# Altium PCB RFM232_V03.PcbDoc
Units mm, origin at the board's own origin, x right, y up, seen from the top; angles counter-clockwise.
Board outline 78.25 x 18.25 mm, 2 copper layers (Top Layer, Bottom Layer), stack 1.571 mm thick; 23 components, 24 nets, 95 pads, 35 vias.
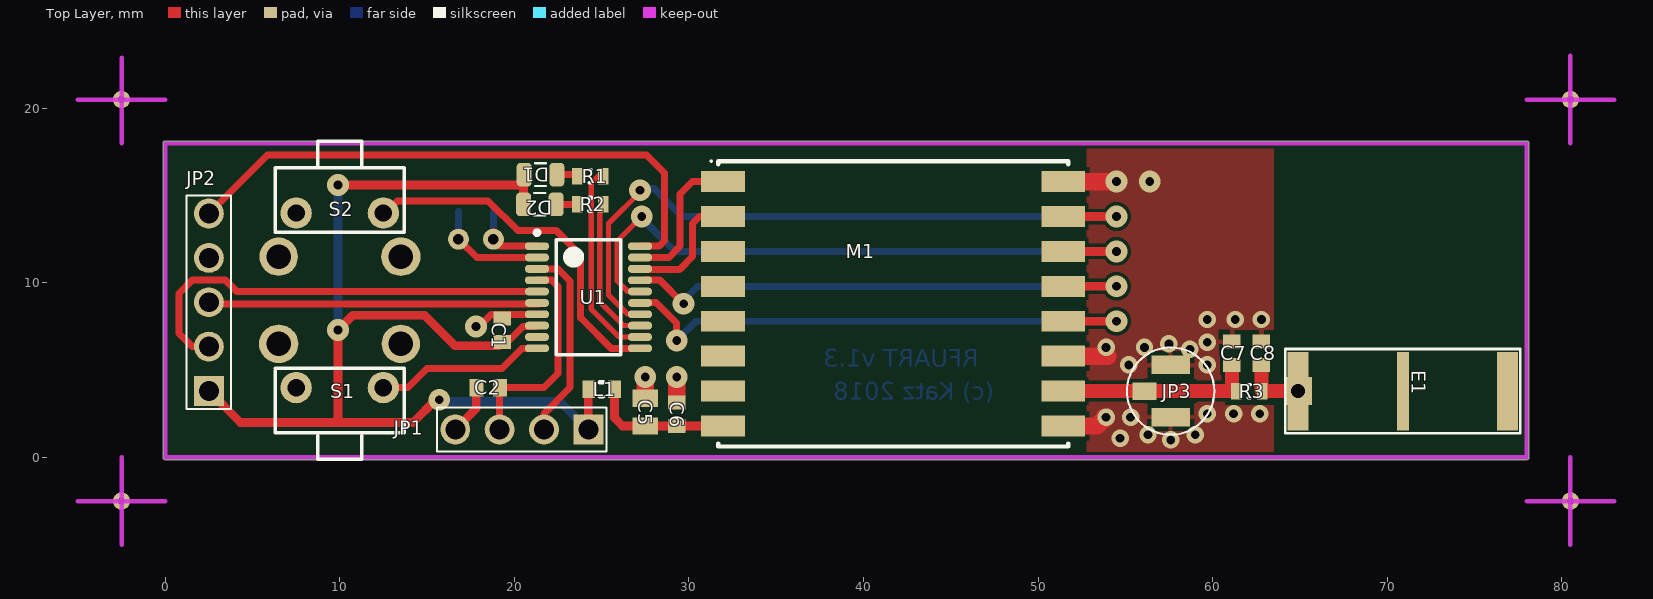
[diagram p0: Top Layer view]
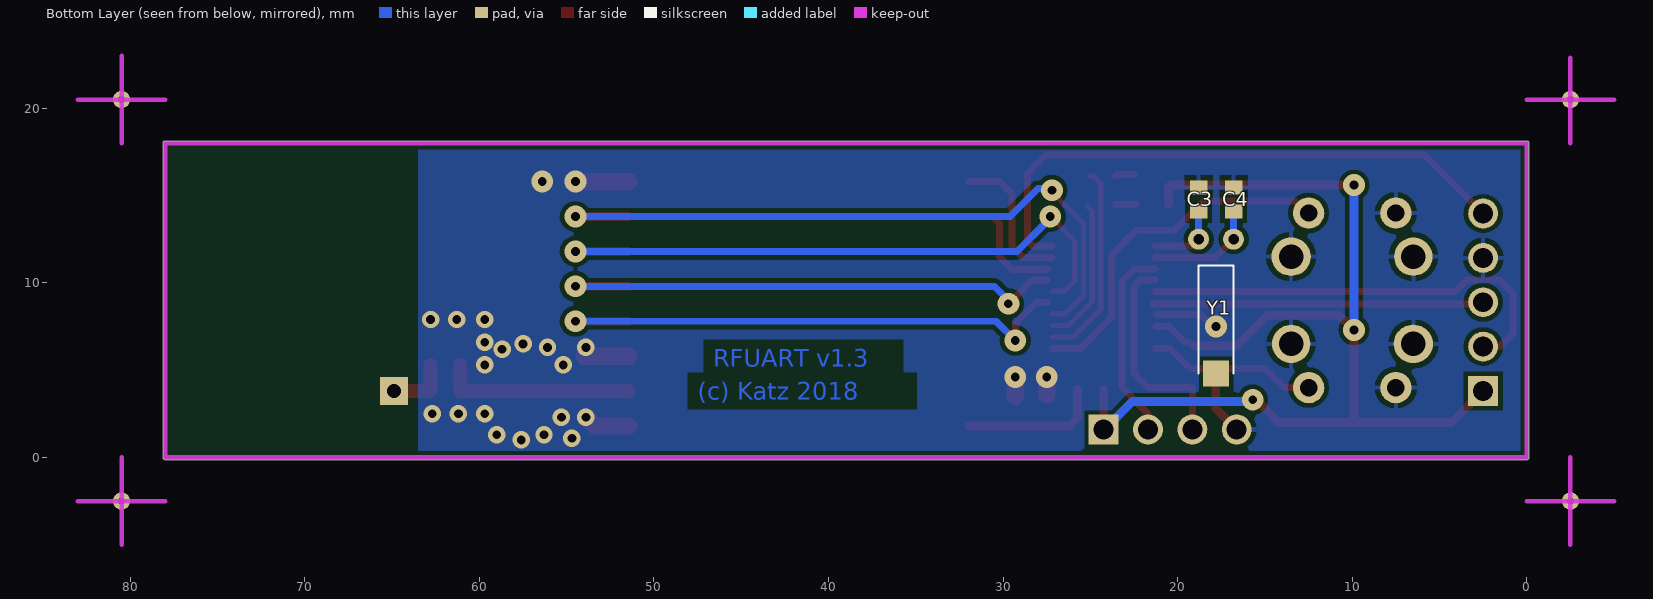
[diagram p1: Bottom Layer view, seen from below]

## Layer stack, top to bottom
Top Solder: solder mask 0.0102, Solder Resist, Dk 3.5
Top Layer: signal copper 0.0356
Dielectric 1: dielectric 1.5, FR-4, Dk 4.8
Bottom Layer: signal copper 0.0356
Bottom Solder: solder mask 0.0102, Solder Resist, Dk 3.5

## Board outline
0,-0.125 cw(c0,0) -0.125,0 -0.125,18 cw(c0,18) 0,18.125 78,18.125 cw(c78,18) 78.125,18 78.125,0 cw(c78,0) 78,-0.125

## Design rules (kind name [scope] priority, off if disabled: settings)
Clearance Clearance_5 [InNamedPolygon('GND_RF') vs InComponent('R3')] p1: gap=0.35 ignorepadtopadclearanceinfootprint=FALSE
Clearance Clearance_4 [InNamedPolygon('GND_B') vs InNet('NetJP3_2')] p2: gap=0.25 ignorepadtopadclearanceinfootprint=FALSE
Clearance Clearance_3 [InNamedPolygon('GND_B')] p3: gap=0.254 ignorepadtopadclearanceinfootprint=FALSE except(0: Arc-Hole Track-Hole SMDPad-Hole THPad-Hole Via-Hole Fill-Hole Poly-Hole Region-Hole Text-Hole)
Clearance Clearance_2 [All vs InComponent('U1')] p4: gap=0.15 ignorepadtopadclearanceinfootprint=FALSE
Clearance Clearance_1 [InNamedPolygon('GND-T1') Or  InNamedPolygon('GND-B1')] p5: gap=0.25 ignorepadtopadclearanceinfootprint=FALSE
Clearance [All] p6: gap=0.2 ignorepadtopadclearanceinfootprint=FALSE
MinimumSolderMaskSliver [All] p1: minsoldermaskwidth=0.02
PolygonConnect PolygonConnect_5 [IsVia vs IsNamedPolygon('GND_RF') Or  IsNamedPolygon('GND_B')] p1: connectstyle=Direct reliefconductorwidth=0.254 reliefentries=4 polygonreliefangle="90 Angle" airgapwidth=0.254
PolygonConnect PolygonConnect_3 [All vs IsNamedPolygon('GND_B')] p2: thpad.connectstyle=Relief thpad.reliefconductorwidth=0.254 thpad.reliefentries=4 thpad.polygonreliefangle="90 Angle" thpad.airgapwidth=0.3 smdpad.connectstyle=Relief smdpad.reliefconductorwidth=0.254 smdpad.reliefentries=4 smdpad.polygonreliefangle="90 Angle" smdpad.airgapwidth=0.3 via.connectstyle=Relief via.reliefconductorwidth=0.254 via.reliefentries=4 via.polygonreliefangle="90 Angle" via.airgapwidth=0.254
PolygonConnect PolygonConnect_2 [All vs IsNamedPolygon('GND_B')] p3: thpad.connectstyle=Relief thpad.reliefconductorwidth=0.254 thpad.reliefentries=4 thpad.polygonreliefangle="90 Angle" thpad.airgapwidth=0.3 smdpad.connectstyle=Relief smdpad.reliefconductorwidth=0.254 smdpad.reliefentries=4 smdpad.polygonreliefangle="90 Angle" smdpad.airgapwidth=0.254 via.connectstyle=Relief via.reliefconductorwidth=0.254 via.reliefentries=4 via.polygonreliefangle="90 Angle" via.airgapwidth=0.254
PolygonConnect PolygonConnect_1 [InComponent('JP3') vs IsNamedPolygon('GND_B') Or  IsNamedPolygon('GND_B')] p4: connectstyle=Relief reliefconductorwidth=0.6 reliefentries=4 polygonreliefangle="90 Angle" airgapwidth=0.15
PolygonConnect PolygonConnect_4 [IsVia vs IsNamedPolygon('GND_B')] p5: connectstyle=Direct reliefconductorwidth=0.254 reliefentries=4 polygonreliefangle="90 Angle" airgapwidth=0.254
PolygonConnect [All] p6: connectstyle=Relief reliefconductorwidth=0.254 reliefentries=4 polygonreliefangle="90 Angle" airgapwidth=0.254
RoutingVias [All] p1: holewidth=0.4 width=0.8 viastyle="Through Hole" minholewidth=0.711 minwidth=1.27 maxholewidth=0.711 maxwidth=1.27
SilkToSilkClearance [All] p1: silktosilkclearance=0.02
SilkToSolderMaskClearance [IsPad] p1: minsilkscreentomaskgap=0 clearancetoexposedcopper=TRUE
SolderMaskExpansion [All] p1: expansion=0.102
Width [All] p1: maxlimit=2 minlimit=0.2 preferedwidth=0.3
27 further rules are at their usual default settings.

## Components (designator, comment, footprint, x,y, rotation, side; value= is the part's Value field where it differs from the comment)
C1 "100n" CAPC1608X08N 19.3,7.275 r90 top
C2 "100n" CAPC1608X08N 18.5,4 r180 top
C3 "22p" CAPC1608X08N 18.8,14.775 r90 bottom
C4 "22p" CAPC1608X08N 16.8,14.775 r90 bottom
C5 "4u7" CAPC2012X11N 27.5,2.6 r90 top
C6 "100n" CAPC1608X08N 29.3,2.475 r90 top
C7 "nc" CAPC1608X08N 61.1,5.975 r90 top
C8 "nc" CAPC1608X08N 62.8,5.975 r90 top
D1 "GREEN" LEDC200X125X80L40N 21.5,16.2 r180 top
D2 "GREEN" LEDC200X125X80L40N 21.465,14.5 r180 top
E1 "C812D5" C812D5 70.9,3.8 r0 top
JP1 "nc" HDRV4W70P254_4X1_889X254H754 24.24,1.6 r180 top
JP2 "Header 5" HDRV5W70P254_5X1_1143X254H754 2.5,3.81 r90 top
JP3 "MHF1-R" MHF1_R 57.6,3.8 r180 top
L1 "BLM18AG601" INDC1608X10N 25,3.9 r0 top
M1 "RFM69HW" LGA16_RFM69 41.7,8.8 r0 top
R1 "1k" RESC1608X06N 24.35,16.1 r0 top
R2 "1k" RESC1608X06N 24.35,14.5 r0 top
R3 "0" RESC1608X06N 62.1,3.8 r0 top
S1 "KLS7" KLS7-TS3602 10,4 r0 top
S2 "KLS7" KLS7-TS3602 10,14 r180 top
U1 "STM8L051F3P6" TSOP65P640X110-20N 24.25,9.175 r0 top
Y1 "32.768k" KX26 17.8,12 r180 bottom

## Footprints (in the part's own frame and the unit in brackets; to place one, negate y for a bottom-side part, rotate by r counter-clockwise, add the part's x,y. Pads: shape width x height; smd on the part's side, far side on the other; paste and mask are expansions set on the pad)
C812D5 [mm]
  rect 1.2x4.5 smd: 1(-6,0) 2(6,0)
  rect 0.7x4.5 smd: 3(0,0)
  silkscreen extent -6.73,-2.41 6.73,2.41, body extent -6.73,-2.41 6.73,2.41, height 1.8
CAPC1608X08N [mm] "Chip Capacitor, 2-Leads, Body 1,60x0,80mm, IPC Medium Density"
  rect 0.8x1 smd: 1(-0.675,0) 2(0.675,0)
  body extent -0.87,-0.48 0.87,0.47, height 0.85
CAPC2012X11N [mm] "Chip Capacitor, 2-Leads, Body 2,00x1,25mm, IPC Medium Density"
  rect 1x1.45 smd: 1(-0.8,0) 2(0.8,0)
  body extent -1.1,-0.72 1.1,0.72, height 1.1
HDRV4W70P254_4X1_889X254H754 [mm] "Header, Vertical, 2.54 mm pitch; 0.70 mm lead width, 4 pins, 1 row, 4 pins per row, 8.89 mm L X 2.54 mm W X 7.54 mm H body"
  rect 1.71x1.71 hole 1.14 paste-1.71: 1(0,0)
  round 1.71 hole 1.14 paste-1.71: 2(2.54,0) 3(5.08,0) 4(7.62,0)
  silkscreen extent -1.04,-1.27 8.66,1.27, body extent -0.64,-1.27 8.25,1.27, height 7.54
HDRV5W70P254_5X1_1143X254H754 [mm] "Header, Vertical, 2.54 mm pitch; 0.70 mm lead width, 5 pins, 1 row, 5 pins per row, 11.43 mm L X 2.54 mm W X 7.54 mm H body"
  rect 1.71x1.71 hole 1.14 paste-1.71: 1(0,0)
  round 1.71 hole 1.14 paste-1.71: 2(2.54,0) 3(5.08,0) 4(7.62,0) 5(10.16,0)
  silkscreen extent -1.04,-1.27 11.2,1.27, body extent -0.64,-1.27 10.79,1.27, height 7.54
INDC1608X10N [mm] "Chip Inductor, 2-Leads, Body 1,60x0,80mm, IPC Medium Density"
  rect 0.74x1.02 smd: 1(-0.735,0) 2(0.735,0)
  silkscreen extent -0.1,-0.41 0.1,0.41, body extent -0.9,-0.5 0.9,0.5, height 1
KLS7-TS3602 [mm] "miniature switch"
  round 1.8 hole 1: 1(-2.5,0) 2(2.5,0)
  oval 2.25x2.2 hole 1.4: 3(-3.5,2.5)
  round 2.2 hole 1.4: 3(3.5,2.5)
  silkscreen extent -3.7,-4.1 3.7,1.1, body extent -3.7,-3.97 3.6,3.75, height 4.4
KX26 [mm] "clock crystal, 2*6 mm"
  round 1.2 hole 0.6: 1(-1,0.5) 2(1,0.5)
  rect 1.5x1.5 smd: 21(0,-7.2)
  silkscreen extent -1,-7.2 1,-1, body extent -1,-7.2 1,-1, height 0.99
LEDC200X125X80L40N [mm] "LED, Chip; 2.00 mm L X 1.25 mm W X 0.80 mm H body"
  rrect51% 0.86x1.35 smd: A(0.935,0) K(-0.935,0)
  silkscreen extent -0.33,-0.65 0.33,0.65, body extent -1,-0.63 1,0.63, height 0.25
LGA16_RFM69 [mm] "LGA, 16-Leads, RFM69HW"
  rect 2.5x1.2 smd: 1(-9.75,7) 2(-9.75,5) 3(-9.75,3) 4(-9.75,1) 5(-9.75,-1) 6(-9.75,-3) 7(-9.75,-5) 8(-9.75,-7) 9(9.75,-7) 10(9.75,-5) 11(9.75,-3) 12(9.75,-1) 13(9.75,1) 14(9.75,3) 15(9.75,5) 16(9.75,7)
  silkscreen extent -10.47,-8.17 10.02,8.22, body extent -9.87,-8.03 9.87,8.03, height 2
MHF1_R [mm]
  rect 1.4x1 smd: 1(1.5,0)
  rect 2.2x1.05 smd: 2(0,1.5) 2(0,-1.5)
  silkscreen extent -2.5,-2.5 2.5,2.5
RESC1608X06N [mm] "Chip Resistor, 2-Leads, Body 1,60x0,82mm, IPC Medium Density"
  rect 0.6x0.95 smd: 1(-0.75,0) 2(0.75,0)
  silkscreen extent -0.05,-0.38 0.05,0.38, body extent -0.85,-0.48 0.85,0.48, height 0.6
TSOP65P640X110-20N [mm] "TSOP, 20-Leads, Body 6,50x4,40mm, Pitch 0,65mm, IPC Medium Density"
  oval 1.4x0.45 smd: 1(-2.95,2.925) 2(-2.95,2.275) 3(-2.95,1.625) 4(-2.95,0.975) 5(-2.95,0.325) 6(-2.95,-0.325) 7(-2.95,-0.975) 8(-2.95,-1.625) 9(-2.95,-2.275) 10(-2.95,-2.925) 11(2.95,-2.925) 12(2.95,-2.275) 13(2.95,-1.625) 14(2.95,-0.975) 15(2.95,-0.325) 16(2.95,0.325) 17(2.95,0.975) 18(2.95,1.625) 19(2.95,2.275) 20(2.95,2.925)
  silkscreen extent -3.07,-3.3 1.85,3.82, body extent -2.25,-3.3 2.25,3.3, height 1.1

## Part data
C1 C2 C3 C4 C5 C6 C7 C8: library part CAPN
D1 D2: library part DLED
JP1: library part "HEADER 4", "4 Pin Header 2,0 mm, 1x04", Part Field 1=CviLux
JP2: "Header, 5-Pin", LatestRevisionDate=17-Jul-2002, LatestRevisionNote="Re-released for DXP Platform.", Publisher="Altium Limited"
JP3: library part MHF1
L1: library part SUPRESOR
M1: library part RFM69HW_V13_2
R1 R2 R3: library part RES
S1 S2: library part SW-1, Вид=Кнопка, Корпус==Footprint, Тип=KLS7
Y1: library part XTAL, "Crystal Oscillator", LatestRevisionDate=17-Jul-2002, LatestRevisionNote="Re-released for DXP Platform.", PackageDescription="Crystal, Thru-Hole; 2 Leads; Body 3.1 x 8.2 mm (Dia.xH)", PackageReference=R38, Published=8-Jun-2000, Publisher="Altium Limited"

## Free pads (board coordinates)
  rect 1.6x1.6 hole 0.8: 0(64.9,3.8)
  round 1 hole 0.4: 2(-2.5,-2.5) 3(80.5,20.5) 4(-2.5,20.5) 5(80.5,-2.5)

## Via types
v1: diameter 1, hole 0.5, Top Layer to Bottom Layer, 19 vias
v2: diameter 1.25, hole 0.5, Top Layer to Bottom Layer, 16 vias

## Nets (pads, with @x,y where several pads share a name; then routed paths per layer and width w, separated by ;. In a path a pad name is that pad's centre, name@x,y a point inside that pad or via, vN(x,y) a via of type N, cw(c..) or ccw(c..) an arc to the next point about the centre after c; other vN are vias at no path point)
GND: C1.2 C2.2 C3.2 C4.2 C5.2 C6.2 C7.2 C8.2 JP1.4 JP2.4 JP3.2 M1.9 M1.11 M1.16 S1.1 S1.3 S2.2 S2.3 U1.7 | length 17
  Top Layer w0.4: v2(17.8,7.5) 18,7.5 18.7,8.2 U1.7@21.2,8.2
  Top Layer w0.5: JP1.4 17.825,2.805 C2.2
  Top Layer w1: C5.2@27.5,3.6 v2(27.5,4.6) ; C6.2@29.3,3.5 v2(29.3,4.6) ; M1.9 53.4,1.8 v1(53.9,2.3) v1@53.8,2.3 ; M1.11 54,5.8 ; M1.16 v2(54.5,15.8)
  other v1: 57.6,1 54.7,1.1 56.3,1.3 59,1.3 55.3,2.3 59.7,2.5 61.2,2.5 62.7,2.5 55.2,5.3 59.7,5.3 58.7,6.2 53.9,6.3 56.1,6.3 57.5,6.5 59.7,6.6 59.7,7.9 61.3,7.9 62.8,7.9
  other v2: 56.4,15.8
IRQ: M1.2 U1.18 | length 6.9
  Top Layer w0.4: U1.18@27.45,10.825 27.5,10.775 29.475,10.775 30.2,11.5 30.2,13.4 30.6,13.8 M1.2
MISO: M1.13 U1.17 | length 31.2
  Top Layer w0.4: U1.17@27.45,10.175 28.325,10.175 v2(29.7,8.8)
  Top Layer w0.5: M1.13 v2(54.5,9.8)
  Bottom Layer w0.4: v2(29.7,8.8) 29.7,9 30.5,9.8 v2(54.5,9.8)
MOSI: M1.14 U1.16 | length 37.4
  Top Layer w0.3: U1.16@27.2,9.525 26.475,9.525 25.9,10.1 25.9,12.4 v2(27.3,13.8)
  Top Layer w0.5: M1.14 v2(54.5,11.8)
  Bottom Layer w0.4: v2(27.3,13.8) 27.7,13.8 27.5,13.6 27.5,13.5 29.2,11.8 v2(54.5,11.8)
NetC2_1: C2.1 JP1.3 U1.4 | length 12.4
  Top Layer w0.4: JP1.3 C2.1@19.16,4 ; C2.1 21.7,4 22.5,4.8 22.5,9.8 22.15,10.15 U1.4
NetC3_1: C3.1 U1.1 Y1.1 | length 4.8
  Top Layer w0.3: Y1.1@18.8,12.4 Y1.1 Y1.1@18.8,13
  Top Layer w0.4: Y1.1@18.8,12.4 19.1,12.1 U1.1
  Bottom Layer w0.4: Y1.1 C3.1
NetC4_1: C4.1 U1.2 Y1.2 | length 6.4
  Top Layer w0.4: Y1.2@16.9,12.4 17.85,11.45 U1.2
  Bottom Layer w0.4: Y1.2 C4.1
NetC5_1: C5.1 C6.1 L1.2 M1.8 | length 8
  Top Layer w0.5: L1.2 25.735,2.265 26.2,1.8 C5.1 M1.8
NetC7_1: C7.1 JP3.1 M1.10 R3.1 | length 11.3
  Top Layer w0.3: R3.1@61.1,4.05 R3.1
  Top Layer w0.8: M1.10 JP3.1 R3.1@61.1,3.8 ; R3.1@61.1,4.05 C7.1
NetC8_1: C8.1 E1.1 pad.0 R3.2 | length 3.6
  Top Layer w0.3: R3.2@62.8,3.85 R3.2 ; E1.1@64.8,3.8 E1.1@64.9,3.9
  Top Layer w0.8: R3.2@62.8,3.85 C8.1 ; R3.2 E1.1@64.8,3.8
NetD1_K: D1.K R1.1 | length 1.2
  Top Layer w0.3: R1.1@23.5,16.2 R1.1
  Top Layer w0.4: D1.K R1.1@23.5,16.2
NetD2_K: D2.K R2.1 | length 1.2
  Top Layer w0.4: D2.K R2.1
NetJP1_2: JP1.2 U1.3 | length 11.3
  Top Layer w0.4: U1.3 22.5,10.8 23.2,10.1 23.2,4 21.7,2.5 JP1.2
NetR1_2: R1.2 U1.12 | length 11.5
  Top Layer w0.3: R1.2@25.05,16.1 24.8,16.1 24.4,15.7 24.4,8.5 26,6.9 U1.12
NetR2_2: R2.2 U1.13 | length 8.5
  Top Layer w0.3: R2.2@25.2,14.4 24.9,14.1 24.9,8.9 26.25,7.55 U1.13
NetS1_2: S1.2 U1.10 | length 9.7
  Top Layer w0.4: S1.2 13.9,4 15,5.1 19.3,5.1 20.45,6.25 U1.10
NetS2_1: S2.1 U1.11 | length 20.6
  Top Layer w0.3: S2.1 S2.1@12.6,14
  Top Layer w0.4: S2.1@12.6,14 13.3,14.7 18.5,14.7 20.2,13 22.4,13 23.8,11.6 23.8,8.222 23.8,8 23.9,7.9 25.55,6.25 U1.11
NSS: M1.15 U1.14 | length 40.5
  Top Layer w0.3: v2(27.2,15.3) 27.3,15.3 25.4,13.4 25.4,9.3 26.475,8.225 U1.14@27.2,8.225
  Top Layer w0.5: M1.15 v2(54.5,13.8)
  Bottom Layer w0.4: v2(27.2,15.3) 27.7,15.3 v2@27.6,15.4 ; v2@27.55,15.45 v2@27.6,15.4 ; v2(54.5,13.8) 29.6,13.8 28,15.4 v2@27.6,15.4
PRG: JP2.5 U1.20 | length 33.3
  Top Layer w0.4: JP2.5 5.855,17.325 27.575,17.325 28.6,16.3 28.6,12.4 28.3,12.1 U1.20
RFRST: M1.1 U1.19 | length 8.3
  Top Layer w0.4: U1.19 28.85,11.45 29.5,12.1 29.5,15.1 30.2,15.8 M1.1
RXD: JP2.3 U1.6 | length 18.9
  Top Layer w0.4: JP2.3 2.59,8.8 U1.6@21.4,8.8
SCK: M1.12 U1.15 | length 32
  Top Layer w0.4: U1.15@27.45,8.875 28.125,8.875 29.3,7.7 v2(29.3,6.7)
  Top Layer w0.5: M1.12 v2(54.5,7.8)
  Bottom Layer w0.4: v2(29.3,6.7) 30.4,7.8 v2(54.5,7.8)
TXD: JP2.2 U1.5 | length 25.4
  Top Layer w0.4: JP2.2 1.55,6.35 0.8,7.1 0.8,9.4 1.575,10.175 3.425,10.175 4.1,9.5 U1.5
VCC: C1.1 D1.A D2.A JP1.1 JP2.1 L1.1 U1.8 | length 64.3
  Top Layer w0.25: L1.1@24.24,3.875 L1.1@24.242,3.902
  Top Layer w0.3: C1.1@19.1,6.4 C1.1 C1.1@19.6,6.6 ; D1.A@20.43,15.6 20.53,15.5
  Top Layer w0.4: C1.1@19.6,6.6 20.5,7.5 U1.8@21.25,7.5
  Top Layer w0.5: JP2.1 4.31,2 9.9,2 ; v2(9.9,15.6) D1.A@20.43,15.6 ; v2(15.7,3.3) 15.5,3.3 14.2,2 9.9,2 ; C1.1@19.1,6.4 16.6,6.4 14.85,8.15 10.75,8.15 v2(9.9,7.3) 9.9,2 ; D2.A 20.53,15.5 ; JP1.1 L1.1@24.24,3.875
  Bottom Layer w0.5: v2(9.9,7.3) v2(9.9,15.6) ; v2(15.7,3.3) 15.8,3.2 22.6,3.2 JP1.1@24.3,1.5
pads on no net: E1.2 E1.3 M1.3 M1.4 M1.5 M1.6 M1.7 U1.9 Y1.21

## Polygon pours and split planes (outlines as drawn)
GND on Top Layer "GND_RF" (solid, remove dead copper, pour order 10): 63.5,0 63.5,18 52.8,18 52.8,0
GND on Bottom Layer "GND_B" (solid, remove dead copper, pour order 8): 0.302,-0.1 63.5,-0.1 63.5,18 0.002,18

## Keep-outs
Keep-Out Layer:
  lines w0.25: 0,0 0,18 78,18 78,0 0,0
  lines w0.254: -5,-2.5 0,-2.5 ; -5,20.5 0,20.5 ; -2.5,-5 -2.5,0 ; -2.5,18 -2.5,22.9 ; 78,-2.5 83,-2.5 ; 78,20.5 83,20.5 ; 80.5,-5 80.5,0 ; 80.5,18 80.5,23

## Other copper
Bottom Layer:
  text "RFUART v1.3" at 46.6,5.2 h1
  text "(c) Katz 2018" at 47.5,3.3 h1

## Dimensions
0,0 to 0,18 on Mechanical 1
0,0 to 78,0 on Mechanical 1